# EAGLE board barath pcb 6 (EAGLE 6.5.0)
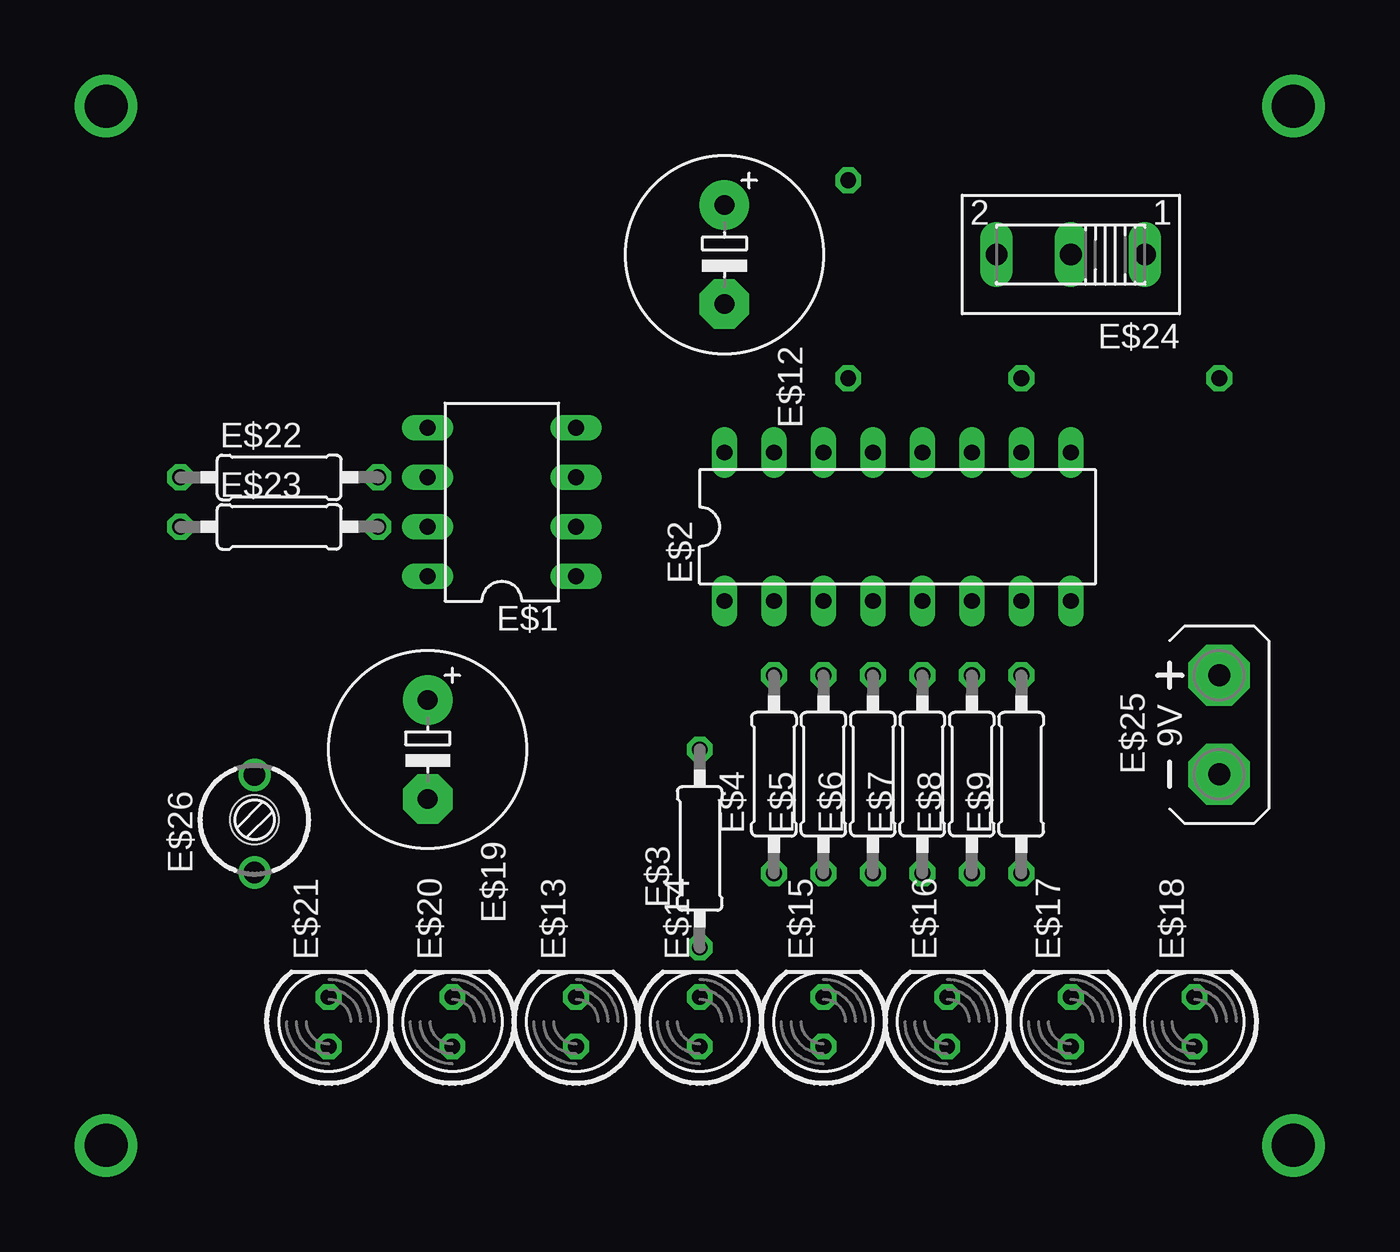
[diagram p0: board, top side]
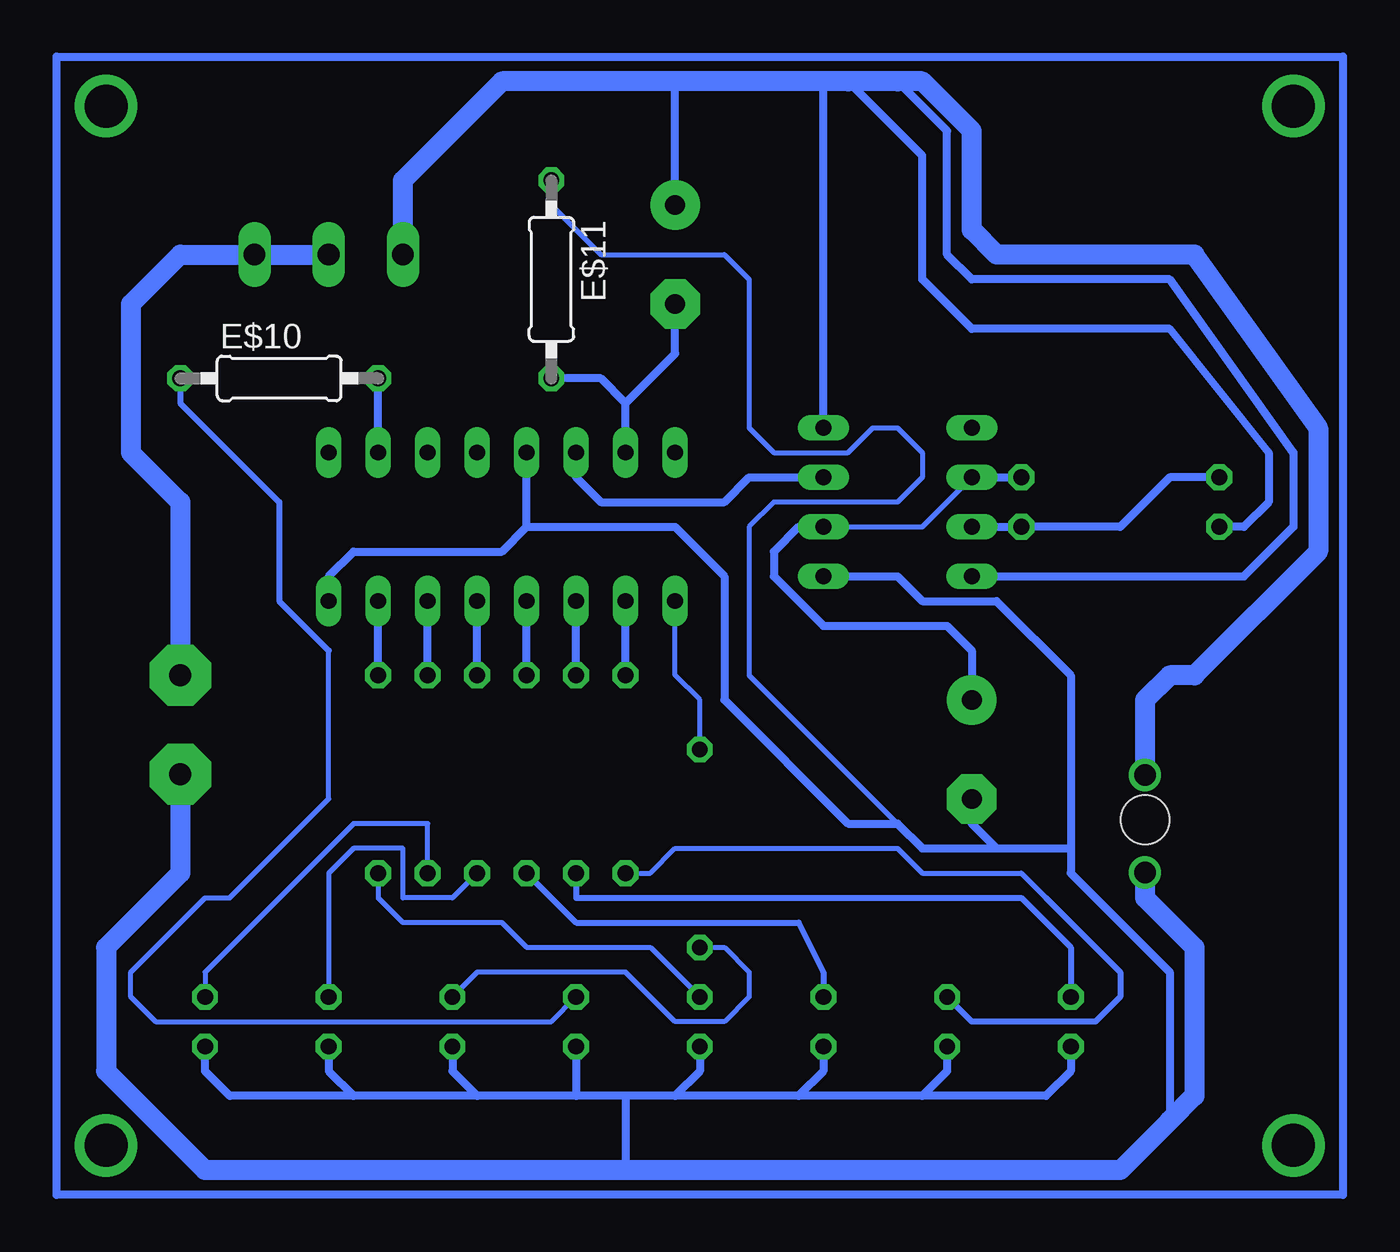
[diagram p1: board, bottom side, seen from below]

No outline drawn. Coordinates in mm, seen from the top.
Copper layers (1*16): Top 0.035mm / dielectric 1.5mm / Bottom 0.035mm
Design rules "default": minimum track width 10mil, minimum drill 24mil, track to track 8mil, track to pad 8mil, pad to pad 8mil, via to via 8mil, smd to smd 8mil, copper to edge 40mil, drill to drill 8mil, minimum pad ring 10mil, minimum via ring 8mil, stop-mask expansion 4mil, vias tented up to drill 0mil, thermal gap 10mil

## Footprints (pad centres in the part's own frame; a part is rotated, then mirrored left to right if it is on the bottom)
DIL08 = drill 0.813 long: 1 -3.81,-3.81; 2 -1.27,-3.81; 3 1.27,-3.81; 4 3.81,-3.81; 5 3.81,3.81; 6 1.27,3.81; 7 -1.27,3.81; 8 -3.81,3.81
DIL16 = drill 0.813 long: 1 -8.89,-3.81; 2 -6.35,-3.81; 3 -3.81,-3.81; 4 -1.27,-3.81; 5 1.27,-3.81; 6 3.81,-3.81; 7 6.35,-3.81; 8 8.89,-3.81; 9 8.89,3.81; 10 6.35,3.81; 11 3.81,3.81; 12 1.27,3.81; 13 -1.27,3.81; 14 -3.81,3.81; 15 -6.35,3.81; 16 -8.89,3.81
0207/10 = drill 0.813 octagon: 1 -5.08,0; 2 5.08,0
E5-10,5 = drill 1.016 pad 2.54: + -2.54,0 | drill 1.016 pad 2.54 octagon: - 2.54,0
LED5MM = drill 0.813 octagon: A -1.27,0; K 1.27,0
255SB = drill 1.118 long: 1 -3.81,0; 2 0,0; 3 3.81,0
AB9V = drill 1.118 pad 3.15 octagon: + 0,2.54; - 0,-2.54
CTRIM3050.505 = drill 1.1: 1 -2.5,0; 2 2.5,0 | hole 2.5: 0.2,0

## Placement (x,y rotation side)
E$1  [DIL08]  22.86,35.56 90 top
E$2  [DIL16]  43.18,34.29 0 top
E$3  [0207/10]  33.02,17.78 90 top
E$4  [0207/10]  36.83,21.59 90 top
E$5  [0207/10]  39.37,21.59 90 top
E$6  [0207/10]  41.91,21.59 90 top
E$7  [0207/10]  44.45,21.59 90 top
E$8  [0207/10]  46.99,21.59 90 top
E$9  [0207/10]  49.53,21.59 90 top
E$10  [0207/10]  54.61,41.91 0 bottom
E$11  [0207/10]  40.64,46.99 270 bottom
E$12  [E5-10,5]  34.29,48.26 270 top
E$13  [LED5MM]  26.67,8.89 90 top
E$14  [LED5MM]  33.02,8.89 90 top
E$15  [LED5MM]  39.37,8.89 90 top
E$16  [LED5MM]  45.72,8.89 90 top
E$17  [LED5MM]  52.07,8.89 90 top
E$18  [LED5MM]  58.42,8.89 90 top
E$19  [E5-10,5]  19.05,22.86 270 top
E$20  [LED5MM]  20.32,8.89 90 top
E$21  [LED5MM]  13.97,8.89 90 top
E$22  [0207/10]  11.43,36.83 0 top
E$23  [0207/10]  11.43,34.29 0 top
E$24  [255SB]  52.07,48.26 180 top
E$25  [AB9V]  59.69,24.13 0 top
E$26  [CTRIM3050.505]  10.16,19.05 90 top

## Library data of the parts
E$1 E$2 = ic-package
E$3-E$12 E$19 E$22 E$23 E$26 = resistor
E$13-E$18 E$20 E$21 = led
E$24 = switch
E$25 = battery

## Nets
S$2: E$2.7 E$9.2
S$3: E$5.1 E$21.K
S$4: E$1.7 E$22.1 E$23.2
S$5: E$1.2 E$1.6 E$22.2
S$6: E$1.4 E$1.8 E$12.+ E$23.1 E$24.3
S$7: E$4.1 E$20.K
S$8: E$2.2 E$4.2
S$9: E$2.3 E$5.2
S$10: E$2.4 E$6.2
S$11: E$2.5 E$7.2
S$12: E$2.6 E$8.2
S$13: E$2.1 E$3.2
S$14: E$24.1 E$24.2 E$25.+
S$15: E$6.1 E$13.K
S$16: E$9.1 E$14.K
S$17: E$2.10 E$10.2
S$18: E$3.1 E$16.K
S$20: E$10.1 E$15.K
S$21: E$7.1 E$17.K
S$22: E$2.15 E$11.2 E$12.-
S$23: E$8.1 E$18.K
S$24: E$1.3 E$2.14
S$26: E$1.1 E$2.8 E$2.13 E$11.1 E$13.A E$14.A E$15.A E$16.A E$17.A E$18.A E$19.- E$20.A E$21.A E$25.-

## Tracks (layer width: path | path; a pad name or v marks a point on that pad's centre or on a via)
S$1
  Bottom 0.406: 0,0 66.04,0 66.04,58.42 0,58.42 0,0
S$2
  Bottom 0.406: E$9.2 E$2.7
S$3
  Bottom 0.305: E$5.1 39.37,15.24 16.51,15.24 13.97,12.7 E$21.K
S$4
  Bottom 0.406: E$22.1 8.89,36.83 11.43,34.29 E$23.2 E$1.7
S$5
  Bottom 0.254: E$1.2 21.59,34.29 E$1.6
  Bottom 0.406: E$1.2 27.94,34.29 29.21,33.02 29.21,31.75 26.67,29.21 20.32,29.21 19.05,27.94 19.05,25.4 | E$1.6 E$22.2
S$6
  Bottom 0.406: E$1.8 5.08,31.75 2.54,34.29 2.54,38.1 8.89,46.99 19.05,46.99 20.32,48.26 20.32,54.61 22.86,57.15 | E$12.+ 34.29,57.15 | E$1.4 26.67,57.15 | 25.4,57.15 21.59,53.34 21.59,46.99 19.05,44.45 8.89,44.45 3.81,38.1 3.81,35.56 5.08,34.29 E$23.1
  Bottom 1.016: E$24.3 48.26,52.07 43.18,57.15 34.29,57.15 26.67,57.15 25.4,57.15 22.86,57.15 21.59,57.15 19.05,54.61 19.05,49.53 17.78,48.26 7.62,48.26 1.27,39.37 1.27,33.02 7.62,26.67 8.89,26.67 10.16,25.4 10.16,21.59
S$7
  Bottom 0.254: E$4.1 35.56,16.51 34.29,17.78 22.86,17.78 21.59,16.51 16.51,16.51 15.24,15.24
  Bottom 0.305: 15.24,15.24 11.43,11.43 11.43,10.16 12.7,8.89 19.05,8.89 E$20.K
S$8
  Bottom 0.406: E$4.2 E$2.2
S$9
  Bottom 0.406: E$5.2 E$2.3
S$10
  Bottom 0.406: E$6.2 E$2.4
S$11
  Bottom 0.406: E$7.2 E$2.5
S$12
  Bottom 0.406: E$8.2 E$2.6
S$13
  Bottom 0.254: E$3.2 33.02,25.4 34.29,26.67 E$2.1
S$14
  Bottom 1.016: E$24.2 E$24.1 59.69,48.26 62.23,45.72 62.23,38.1 59.69,35.56 E$25.+
S$15
  Bottom 0.305: E$6.1 39.37,13.97 27.94,13.97 26.67,11.43 E$13.K
S$16
  Bottom 0.254: E$14.K 35.56,12.7 41.91,12.7 43.18,13.97 48.26,13.97 49.53,15.24 E$9.1
S$17
  Bottom 0.406: E$2.10 E$10.2
S$18
  Bottom 0.254: E$3.1 31.75,12.7 30.48,11.43 30.48,10.16 31.75,8.89 34.29,8.89 36.83,11.43 44.45,11.43 E$16.K
S$20
  Bottom 0.254: 52.07,27.94 52.07,20.32 57.15,15.24 58.42,15.24 62.23,11.43 62.23,10.16 60.96,8.89 40.64,8.89 E$15.K
  Bottom 0.305: E$10.1 59.69,40.64 54.61,35.56 54.61,30.48 52.07,27.94
S$21
  Bottom 0.254: E$7.1 45.72,15.24 48.26,15.24 48.26,17.78 50.8,17.78 52.07,16.51 E$17.K
S$22
  Bottom 0.406: E$2.15 36.83,40.64 | 36.83,40.64 38.1,41.91 E$11.2 | 36.83,40.64 34.29,43.18 E$12.-
S$23
  Bottom 0.254: E$8.1 46.99,19.05 50.8,19.05 58.42,11.43 E$18.K
S$24
  Bottom 0.406: E$2.14 39.37,36.83 38.1,35.56 31.75,35.56 30.48,36.83 E$1.3
S$26
  Bottom 0.254: E$11.1 40.64,50.8 38.1,48.26 31.75,48.26 30.48,46.99 30.48,39.37 29.21,38.1 25.4,38.1 24.13,39.37 22.86,39.37 21.59,38.1 21.59,36.83 22.86,35.56 29.21,35.56 30.48,34.29 30.48,26.67 22.86,19.05
  Bottom 0.406: E$16.A 45.72,6.35 44.45,5.08 | E$20.A 20.32,6.35 21.59,5.08 | E$21.A 13.97,6.35 15.24,5.08 21.59,5.08 | 21.59,5.08 27.94,5.08 | 27.94,5.08 34.29,5.08 | 34.29,5.08 36.83,5.08 | 36.83,5.08 39.37,5.08 | 39.37,5.08 44.45,5.08 | 44.45,5.08 50.8,5.08 | 50.8,5.08 57.15,5.08 58.42,6.35 E$18.A | E$13.A 26.67,6.35 27.94,5.08 | E$14.A 33.02,6.35 34.29,5.08 | E$15.A 39.37,5.08 | E$17.A 52.07,6.35 50.8,5.08 | E$2.8 52.07,31.75 50.8,33.02 43.18,33.02 41.91,34.29 | 41.91,34.29 E$2.13 | 41.91,34.29 34.29,34.29 31.75,31.75 31.75,25.4 25.4,19.05 22.86,19.05 21.59,17.78 17.78,17.78 | E$19.- 19.05,19.05 17.78,17.78 | E$1.1 22.86,31.75 21.59,30.48 17.78,30.48 13.97,26.67 13.97,17.78 | 13.97,17.78 13.97,16.51 8.89,11.43 8.89,3.81 | 17.78,17.78 13.97,17.78 | 36.83,5.08 36.83,1.27
  Bottom 1.016: E$25.- 59.69,16.51 63.5,12.7 63.5,6.35 58.42,1.27 36.83,1.27 11.43,1.27 8.89,3.81 7.62,5.08 7.62,12.7 10.16,15.24 10.16,16.51
S$28  (via drill 2.2 pad 2.54)
  other vias: 2.54,55.88
S$29  (via drill 2.2 pad 2.54)
  other vias: 63.5,55.88
S$30  (via drill 2.2 pad 2.54)
  other vias: 63.5,2.54
S$31  (via drill 2.2 pad 2.54)
  other vias: 2.54,2.54